# EAGLE board PCB (EAGLE 9.7.0)
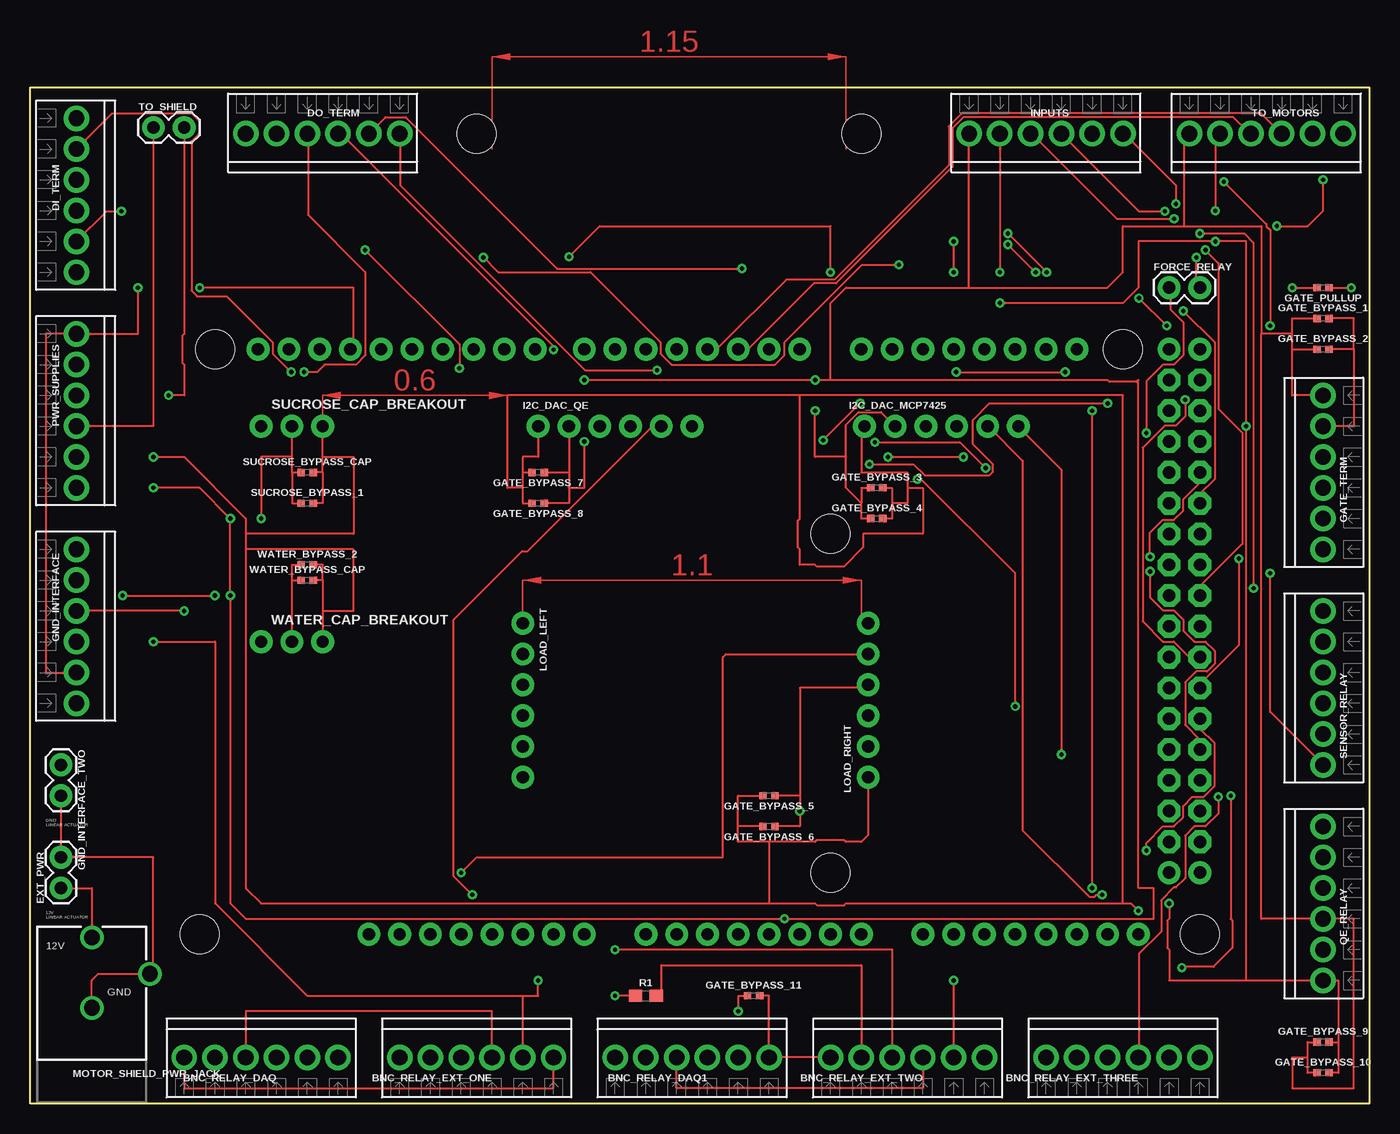
[diagram p0: board, top side]
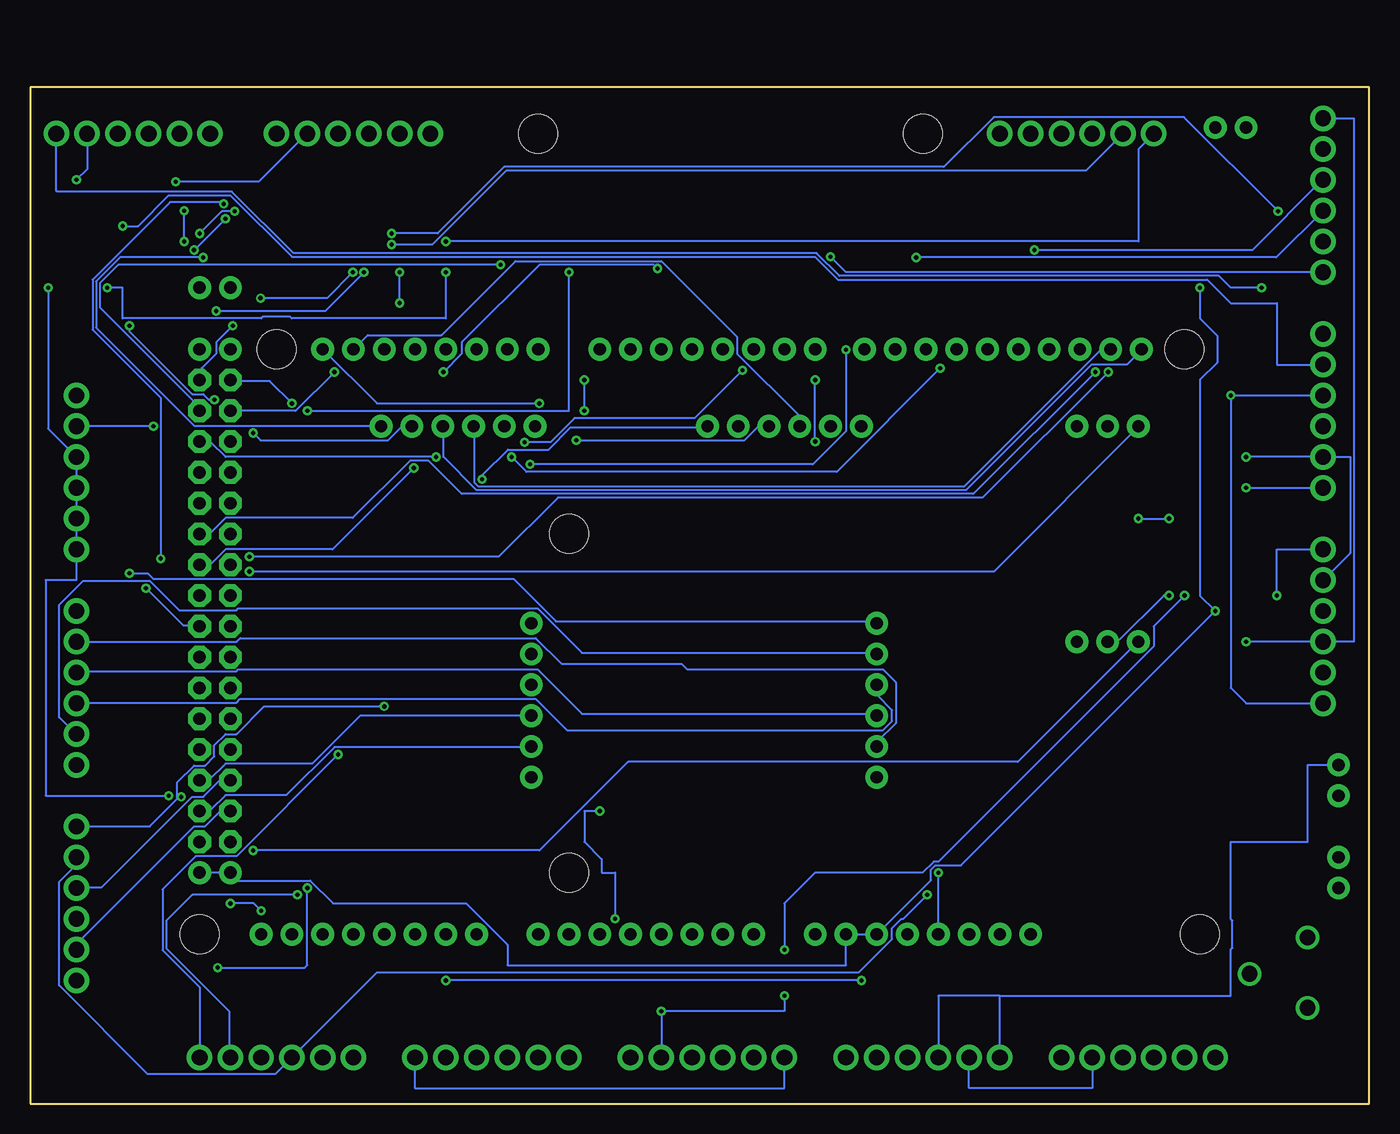
[diagram p1: board, bottom side, seen from below]

Size 110.49 x 83.82 mm. Coordinates in mm from the lower left corner, seen from the top.
Outline: 0,83.82 110.49,83.82 110.49,0 0,0 0,83.82
Copper layers (1*16): Top / Bottom
Stack-up Default Layer Stack: Top User Defined 0.035mm / Dielectric-1 User Defined 1.5mm / Bottom User Defined 0.035mm
Design rules "default": minimum track width 6mil, minimum drill 0.35mm, track to track 6mil, track to pad 6mil, pad to pad 6mil, via to via 6mil, smd to smd 6mil, copper to edge 40mil, drill to drill 6mil, minimum pad ring 10mil, minimum via ring 8mil, stop-mask expansion 4mil, vias tented up to drill 0mil, thermal gap 10mil
Holes 3.17 mm at 36.83,80.01 68.58,80.01

## Footprints (pad centres in the part's own frame; a part is rotated, then mirrored left to right if it is on the bottom)
1X06_2.54MM_SCREWPIN = drill 1.3 pad 2.1: 1 -6.35,0; 2 -3.81,0; 3 -1.27,0; 4 1.27,0; 5 3.81,0; 6 6.35,0
1X02 = drill 1.016 pad 1.88: 1 0,0; 2 2.54,0
0402-TIGHT = smd 0.6 x 0.6: 1 -0.5,0; 2 0.5,0
1X06_NO_SILK = drill 1.016 pad 1.88: 1 0,0; 2 2.54,0; 3 5.08,0; 4 7.62,0; 5 10.16,0; 6 12.7,0
POWER_JACK_PTH_BREAD = drill 1.3: GND 0,7.9; GNDBREAK 4.8,10.7; PWR 0,13.7
0603 = smd 1.1 x 1: 1 -0.85,0; 2 0.85,0
ARDUINO_DUE_F = drill 1.016 pad 1.88: 0 63.5,50.8; 1 60.96,50.8; 2 58.42,50.8; 3 55.88,50.8; 3.3V 35.56,2.54; 4 53.34,50.8; 5 50.8,50.8; 5V 38.1,2.54; 5V. 93.98,50.8; 5V.. 96.52,50.8; 6 48.26,50.8; 7 45.72,50.8; 8 41.656,50.8; 9 39.116,50.8; 10 36.576,50.8; 11 34.036,50.8; 12 31.496,50.8; 13 28.956,50.8; 14 68.58,50.8; 15 71.12,50.8; 16 73.66,50.8; 17 76.2,50.8; 18 78.74,50.8; 19 81.28,50.8; 20 83.82,50.8; 21 86.36,50.8; A0 50.8,2.54; A1 53.34,2.54; A2 55.88,2.54; A3 58.42,2.54; A4 60.96,2.54; A5 63.5,2.54; A6 66.04,2.54; A7 68.58,2.54; A8 73.66,2.54; A9 76.2,2.54; A10 78.74,2.54; A11 81.28,2.54; A12 83.82,2.54; A13 86.36,2.54; A14 88.9,2.54; A15 91.44,2.54; AREF 23.876,50.8; GND 26.416,50.8; GND. 43.18,2.54; GND.. 40.64,2.54; GND... 93.98,7.62; GND.... 96.52,7.62; I/OREF 30.48,2.54; N/C 27.94,2.54; RESET 33.02,2.54; SCL1 18.796,50.8; SDA1 21.336,50.8; VIN 45.72,2.54 | drill 1.016 pad 1.88 octagon: 22 93.98,48.26; 23 96.52,48.26; 24 93.98,45.72; 25 96.52,45.72; 26 93.98,43.18; 27 96.52,43.18; 28 93.98,40.64; 29 96.52,40.64; 30 93.98,38.1; 31 96.52,38.1; 32 93.98,35.56; 33 96.52,35.56; 34 93.98,33.02; 35 96.52,33.02; 36 93.98,30.48; 37 96.52,30.48; 38 93.98,27.94; 39 96.52,27.94; 40 93.98,25.4; 41 96.52,25.4; 42 93.98,22.86; 43 96.52,22.86; 44 93.98,20.32; 45 96.52,20.32; 46 93.98,17.78; 47 96.52,17.78; 48 93.98,15.24; 49 96.52,15.24; 50 93.98,12.7; 51 96.52,12.7; 52 93.98,10.16; 53 96.52,10.16 | hole 3.2: 15.24,50.8; 13.97,2.54; 66.04,35.56; 66.04,7.62; 90.17,50.8; 96.52,2.54
BRM-2508_VERTX = drill 1.016 pad 1.88: OUT -2.54,0; VDD 0,0; VSS 2.54,0

## Placement (x,y rotation side)
BNC_RELAY_DAQ  [1X06_2.54MM_SCREWPIN]  19.05,3.81 180 top
BNC_RELAY_DAQ1  [1X06_2.54MM_SCREWPIN]  54.61,3.81 180 top
BNC_RELAY_EXT_ONE  [1X06_2.54MM_SCREWPIN]  36.83,3.81 180 top
BNC_RELAY_EXT_THREE  [1X06_2.54MM_SCREWPIN]  90.17,3.81 180 top
BNC_RELAY_EXT_TWO  [1X06_2.54MM_SCREWPIN]  72.39,3.81 180 top
DI_TERM  0  [1X06_2.54MM_SCREWPIN]  3.81,74.93 90 top
DO_TERM  1  [1X06_2.54MM_SCREWPIN]  24.13,80.01 0 top
EXT_PWR  2  [1X02]  2.54,17.78 90 top
FORCE_RELAY  3  [1X02]  93.98,67.31 0 top
GATE_BYPASS_1  0.1uF  [0402-TIGHT]  106.68,64.77 0 top
GATE_BYPASS_2  10nF  [0402-TIGHT]  106.68,62.23 0 top
GATE_BYPASS_3  10nF  [0402-TIGHT]  69.85,50.8 0 top
GATE_BYPASS_4  0.1uF  [0402-TIGHT]  69.85,48.26 0 top
GATE_BYPASS_5  10nF  [0402-TIGHT]  60.96,25.4 180 top
GATE_BYPASS_6  0.1uF  [0402-TIGHT]  60.96,22.86 180 top
GATE_BYPASS_7  10nF  [0402-TIGHT]  41.91,52.07 180 top
GATE_BYPASS_8  0.1uF  [0402-TIGHT]  41.91,49.53 180 top
GATE_BYPASS_9  10nF  [0402-TIGHT]  106.68,5.08 0 top
GATE_BYPASS_10  0.1uF  [0402-TIGHT]  106.68,2.54 0 top
GATE_BYPASS_11  0.1uF  [0402-TIGHT]  59.69,8.89 0 top
GATE_PULLUP  3.3KOHM-0402T-1/16W-1%  [0402-TIGHT]  106.68,67.31 180 top
GATE_TERM  5  [1X06_2.54MM_SCREWPIN]  106.68,52.07 270 top
GND_INTERFACE  [1X06_2.54MM_SCREWPIN]  3.81,39.37 90 top
GND_INTERFACE_TWO  [1X02]  2.54,27.94 270 top
I2C_DAC_MCP7425  5  [1X06_NO_SILK]  68.83,55.88 0 top
I2C_DAC_QE  5  [1X06_NO_SILK]  41.91,55.88 0 top
INPUTS  6  [1X06_2.54MM_SCREWPIN]  83.82,80.01 0 top
LOAD_LEFT  7  [1X06_NO_SILK]  40.64,39.62 270 top
LOAD_RIGHT  8  [1X06_NO_SILK]  69.14,26.92 90 top
MOTOR_SHIELD_PWR_JACK  POWER_JACKPTH_BREAD  [POWER_JACK_PTH_BREAD]  5.08,0 0 top
PWR_SUPPLIES  [1X06_2.54MM_SCREWPIN]  3.81,57.15 90 top
QE_RELAY  5  [1X06_2.54MM_SCREWPIN]  106.68,16.51 270 top
R1  68.1k  [0603]  50.8,8.89 0 top
REWARDS_DUE  ARDUINO_DUE  [ARDUINO_DUE_F]  0,11.43 0 top
SENSOR_RELAY  9  [1X06_2.54MM_SCREWPIN]  106.68,34.29 270 top
SUCROSE_BYPASS_1  10nF  [0402-TIGHT]  22.86,49.53 0 top
SUCROSE_BYPASS_CAP  0.1uF  [0402-TIGHT]  22.86,52.07 0 top
SUCROSE_CAP_BREAKOUT  AT42QT1011-MAHR  [BRM-2508_VERTX]  21.59,55.88 0 top
TO_MOTORS  10  [1X06_2.54MM_SCREWPIN]  102,80.01 0 top
TO_SHIELD  0  [1X02]  10.16,80.52 0 top
WATER_BYPASS_2  10nF  [0402-TIGHT]  22.86,44.45 0 top
WATER_BYPASS_CAP  0.1uF  [0402-TIGHT]  22.86,43.18 0 top
WATER_CAP_BREAKOUT  AT42QT1011-MAHR  [BRM-2508_VERTX]  21.59,38.1 0 top

## Library data of the parts
BNC_RELAY_DAQ BNC_RELAY_DAQ1 BNC_RELAY_EXT_ONE BNC_RELAY_EXT_THREE BNC_RELAY_EXT_TWO DI_TERM DO_TERM GATE_TERM GND_INTERFACE INPUTS PWR_SUPPLIES QE_RELAY SENSOR_RELAY TO_MOTORS = SparkFun-Connectors; PROD_ID: CONN-14885
EXT_PWR FORCE_RELAY GND_INTERFACE_TWO TO_SHIELD = SparkFun-Connectors
GATE_BYPASS_1 GATE_BYPASS_4 GATE_BYPASS_6 GATE_BYPASS_8 GATE_BYPASS_10 GATE_BYPASS_11 SUCROSE_BYPASS_CAP WATER_BYPASS_CAP = SparkFun-RF; PROD_ID: CAP-15083
GATE_BYPASS_2 GATE_BYPASS_3 GATE_BYPASS_5 GATE_BYPASS_7 GATE_BYPASS_9 SUCROSE_BYPASS_1 WATER_BYPASS_2 = SparkFun-Capacitors; PROD_ID: CAP-16508
GATE_PULLUP = SparkFun-Resistors; PROD_ID: RES-15923
I2C_DAC_MCP7425 I2C_DAC_QE LOAD_LEFT LOAD_RIGHT = SparkFun-Connectors; PROD_ID: CONN-08437
MOTOR_SHIELD_PWR_JACK = SparkFun-Connectors; PROD_ID: COMP-13253
R1 = SparkFun-Resistors; PROD_ID: RES-09380
REWARDS_DUE = NO_SILK
SUCROSE_CAP_BREAKOUT WATER_CAP_BREAKOUT = 1011MOD

## Nets
3.3V: GND_INTERFACE.1 PWR_SUPPLIES.4 TO_SHIELD.2
5V: GATE_BYPASS_1.1 GATE_BYPASS_2.1 GATE_BYPASS_3.1 GATE_BYPASS_4.1 GATE_BYPASS_5.1 GATE_BYPASS_6.1 GATE_BYPASS_7.1 GATE_BYPASS_8.1 GATE_BYPASS_9.1 GATE_BYPASS_10.1 GATE_TERM.1 I2C_DAC_MCP7425.2 I2C_DAC_QE.2 INPUTS.1 LOAD_RIGHT.4 PWR_SUPPLIES.1 QE_RELAY.4 SUCROSE_BYPASS_1.1 SUCROSE_BYPASS_CAP.1 SUCROSE_CAP_BREAKOUT.VDD TO_MOTORS.1 WATER_BYPASS_2.1 WATER_BYPASS_CAP.1 WATER_CAP_BREAKOUT.VDD
5V_3A_GND: GND_INTERFACE.2 PWR_SUPPLIES.6 TO_MOTORS.6
5V_3A_PWR: PWR_SUPPLIES.5 TO_MOTORS.5
13.4V: PWR_SUPPLIES.3 TO_SHIELD.1
BLK: LOAD_LEFT.2 SENSOR_RELAY.5
BRUKER_GND: BNC_RELAY_EXT_TWO.4 GND_INTERFACE.6
CLK: LOAD_RIGHT.2 REWARDS_DUE.51
COM_REMOVE_SPOUT: REWARDS_DUE.3 TO_MOTORS.4
COM_SWAP_SPOUT: REWARDS_DUE.2 TO_MOTORS.3
DAQ_AGND: BNC_RELAY_EXT_ONE.4 BNC_RELAY_EXT_ONE.6 GND_INTERFACE_TWO.1
DAQ_GND: BNC_RELAY_EXT_ONE.2 BNC_RELAY_EXT_TWO.2 DI_TERM.6 GND_INTERFACE.3
DAT: LOAD_RIGHT.3 REWARDS_DUE.49
DGND: GND_INTERFACE.4 REWARDS_DUE.GND REWARDS_DUE.GND. REWARDS_DUE.GND.. REWARDS_DUE.GND... REWARDS_DUE.GND....
FLAGGER_ONE: BNC_RELAY_DAQ.6 BNC_RELAY_EXT_ONE.1
FLAGGER_TWO: BNC_RELAY_DAQ1.6 BNC_RELAY_EXT_TWO.1
FORCE_LOGIC: LOAD_RIGHT.5 REWARDS_DUE.3.3V
FORCE_OUT_REF: BNC_RELAY_EXT_THREE.2 FORCE_RELAY.1 I2C_DAC_MCP7425.5
FORCE_OUT_SIG: BNC_RELAY_EXT_THREE.1 FORCE_RELAY.2 I2C_DAC_MCP7425.6
GATE_DRIVE: DO_TERM.1 GATE_PULLUP.2
GATE_TRIGGER: DI_TERM.1 GATE_PULLUP.1 GATE_TERM.3 GATE_TERM.4 GATE_TERM.5 GATE_TERM.6
GND: GATE_BYPASS_1.2 GATE_BYPASS_2.2 GATE_BYPASS_3.2 GATE_BYPASS_4.2 GATE_BYPASS_5.2 GATE_BYPASS_6.2 GATE_BYPASS_7.2 GATE_BYPASS_8.2 GATE_BYPASS_9.2 GATE_BYPASS_10.2 GATE_TERM.2 GND_INTERFACE.5 I2C_DAC_MCP7425.1 I2C_DAC_QE.1 INPUTS.2 LOAD_RIGHT.1 PWR_SUPPLIES.2 QE_RELAY.6 SUCROSE_BYPASS_1.2 SUCROSE_BYPASS_CAP.2 SUCROSE_CAP_BREAKOUT.VSS TO_MOTORS.2 WATER_BYPASS_2.2 WATER_BYPASS_CAP.2 WATER_CAP_BREAKOUT.VSS
GRN: LOAD_LEFT.4 SENSOR_RELAY.3
IMAGING_SYNC: BNC_RELAY_DAQ1.4 BNC_RELAY_EXT_TWO.3
LINEAR_ACTUATOR_COMMAND: BNC_RELAY_DAQ.2 BNC_RELAY_EXT_ONE.5
MOTOR_PROPRIOCEPTION: BNC_RELAY_DAQ1.2 GATE_BYPASS_11.1 R1.1
MS_GND: EXT_PWR.2 GND_INTERFACE_TWO.2 MOTOR_SHIELD_PWR_JACK.GND MOTOR_SHIELD_PWR_JACK.GNDBREAK
MS_PWR: EXT_PWR.1 MOTOR_SHIELD_PWR_JACK.PWR
N$1: BNC_RELAY_EXT_TWO.5 R1.2
N$3: R1.1
N$4: BNC_RELAY_DAQ1.1 BNC_RELAY_EXT_TWO.6 GATE_BYPASS_11.2
PERMIT_SUCROSE: DO_TERM.2 REWARDS_DUE.31
PERMIT_WATER: DO_TERM.3 REWARDS_DUE.33
QE_1: QE_RELAY.3 REWARDS_DUE.48
QE_2: QE_RELAY.5 REWARDS_DUE.50
QE_OUT_REF: BNC_RELAY_EXT_THREE.4 I2C_DAC_QE.5 QE_RELAY.2
QE_OUT_SIG: BNC_RELAY_EXT_THREE.3 I2C_DAC_QE.6 QE_RELAY.1
RED: LOAD_LEFT.1 SENSOR_RELAY.6
REMOVE_SPOUTS: DO_TERM.5 REWARDS_DUE.24
SCL_FORCE: I2C_DAC_MCP7425.4 REWARDS_DUE.SCL1
SCL_QE: I2C_DAC_QE.4 REWARDS_DUE.21
SDA_FORCE: I2C_DAC_MCP7425.3 REWARDS_DUE.SDA1
SDA_QE: I2C_DAC_QE.3 REWARDS_DUE.20
SOLE_1_EN: INPUTS.3 REWARDS_DUE.37
SOLE_1_IN: INPUTS.5 REWARDS_DUE.41
SOLE_2_EN: INPUTS.4 REWARDS_DUE.39
SOLE_2_IN: INPUTS.6 REWARDS_DUE.43
SUCROSE_CAP_SIGNAL: REWARDS_DUE.47 SUCROSE_CAP_BREAKOUT.OUT
SUCROSE_LICK: DI_TERM.4 REWARDS_DUE.27
SUCROSE_REWARD: DI_TERM.2 REWARDS_DUE.23
SWAP_SPOUTS: DO_TERM.4 REWARDS_DUE.22
UCS_COMMAND: BNC_RELAY_DAQ.4 BNC_RELAY_EXT_ONE.3
WATER_CAP_SIGNAL: REWARDS_DUE.45 WATER_CAP_BREAKOUT.OUT
WATER_LICK: DI_TERM.5 REWARDS_DUE.29
WATER_REWARD: DI_TERM.3 REWARDS_DUE.25
WET_START: DO_TERM.6 REWARDS_DUE.35
WHT: LOAD_LEFT.3 SENSOR_RELAY.4
YLW: LOAD_LEFT.5 SENSOR_RELAY.2

## Tracks (layer width: path | path; a pad name or v marks a point on that pad's centre or on a via)
3.3V  (via drill 0.35)
  Top 0.152: TO_SHIELD.2 12.7,63.5 12.55,63.35 12.55,61.12 12.7,60.96 12.7,58.42 v11.43,58.42
  Bottom 0.152: PWR_SUPPLIES.4 v11.43,58.42 11.43,34.29 10.16,33.02 GND_INTERFACE.1
5V  (via drill 0.35)
  Top 0.152: WATER_CAP_BREAKOUT.VDD 21.59,43.18 | 21.59,43.18 WATER_BYPASS_CAP.1 | 21.59,43.18 21.59,44.45 WATER_BYPASS_2.1 | 21.59,52.07 21.59,53.34 | 21.59,53.34 SUCROSE_CAP_BREAKOUT.VDD | 21.59,52.07 SUCROSE_BYPASS_CAP.1 | 21.59,52.07 21.59,49.53 SUCROSE_BYPASS_1.1 | I2C_DAC_QE.2 44.45,52.07 | GATE_BYPASS_7.1 44.45,52.07 | 44.45,52.07 44.45,50.8 | 44.45,50.8 44.45,49.53 GATE_BYPASS_8.1 | LOAD_RIGHT.4 68.89,34.29 63.5,34.29 63.5,25.4 | 63.5,25.4 GATE_BYPASS_5.1 | 63.5,25.4 v63.5,24.13 63.5,22.86 GATE_BYPASS_6.1 | GATE_BYPASS_10.1 105.41,2.54 105.41,3.81 | 105.41,3.81 105.41,5.08 GATE_BYPASS_9.1 | 105.41,3.81 104.14,3.81 104.14,1.27 109.22,1.27 109.22,15.24 QE_RELAY.4 101.6,15.24 101.6,63.5 | GATE_TERM.1 104.14,58.42 104.14,62.23 | 104.14,62.23 GATE_BYPASS_2.1 | 104.14,62.23 104.14,63.5 | 104.14,63.5 104.14,64.77 GATE_BYPASS_1.1 | GATE_BYPASS_4.1 68.58,48.26 68.58,49.53 | 68.58,49.53 68.58,50.8 GATE_BYPASS_3.1 | 21.59,53.34 19.05,53.34 v19.05,48.26 | v10.16,50.8 13.97,50.8 v16.51,48.26 v16.51,41.91 16.51,16.51 17.78,15.24 v62.23,15.24 92.71,15.24 92.71,17.78 91.44,17.78 91.44,59.69 91.28,59.54 89.05,59.54 88.9,59.69 66.04,59.69 | 66.04,59.69 v64.77,59.69 v45.72,59.69 | 68.58,49.53 67.31,50.8 67.31,53.34 | 67.31,53.34 67.31,56.01 68.35,57.05 70.21,57.05 I2C_DAC_MCP7425.2 | 67.31,53.34 64.77,53.34 v64.77,57.15 | 44.45,50.8 45.72,50.8 v45.72,54.61 | 66.04,59.69 66.04,66.04 67.31,67.31 77.47,67.31 | 77.47,67.31 88.9,67.31 90.17,68.58 90.17,72.39 95.25,72.39 | 95.25,72.39 101.6,72.39 101.6,63.5 | 95.25,72.39 95.25,79.61 TO_MOTORS.1 | 104.14,63.5 101.6,63.5 | 77.47,67.31 INPUTS.1
  Bottom 0.152: v10.16,50.8 PWR_SUPPLIES.1 | v19.05,48.26 v16.51,48.26 | v63.5,24.13 64.77,24.13 64.77,21.59 63.35,20.16 63.35,19.05 62.23,19.05 v62.23,15.24 | v64.77,57.15 v64.77,59.69 | v45.72,54.61 v45.72,59.69 | WATER_CAP_BREAKOUT.VDD 20.78,38.1 16.97,41.91 v16.51,41.91
5V_3A_GND  (via drill 0.35)
  Top 0.152: GND_INTERFACE.2 1.27,35.56 1.27,63.5 PWR_SUPPLIES.6 8.89,63.5 v8.89,67.31
  Bottom 0.152: TO_MOTORS.6 108.35,75.33 108.25,75.24 93.85,75.24 88.77,70.16 45.61,70.16 43.73,68.28 12.39,68.28 11.43,67.31 v8.89,67.31
5V_3A_PWR  (via drill 0.35)
  Top 0.152: v106.68,76.2 106.68,73.66 105.41,72.39 v102.87,72.39
  Bottom 0.152: TO_MOTORS.5 105.81,77.07 v106.68,76.2 | v102.87,72.39 101.6,72.39 99.06,74.93 93.98,74.93 88.9,69.85 45.74,69.85 43.86,67.97 13.36,67.97 11.43,66.04 7.62,66.04 7.62,60.96 PWR_SUPPLIES.5
13.4V
  Top 0.152: TO_SHIELD.1 10.16,55.88 PWR_SUPPLIES.3
BLK
  Bottom 0.152: LOAD_LEFT.2 40.74,37.19 64.97,37.19 68.63,40.84 93.32,40.84 93.47,40.69 98.2,40.69 100.63,43.13 106.12,43.13 108.1,41.15 108.1,31.85 106.73,30.48 SENSOR_RELAY.5
BRUKER_GND  (via drill 0.35)
  Top 0.152: v7.62,41.91 v15.24,41.91 | v48.26,12.7 71.12,12.7 BNC_RELAY_EXT_TWO.4
  Bottom 0.152: GND_INTERFACE.6 7.62,45.72 v7.62,41.91 | v15.24,41.91 17.78,39.37 17.78,37.72 35.54,19.96 35.94,19.96 36.85,19.05 45.72,19.05 48.26,16.51 v48.26,12.7
CLK
  Bottom 0.152: REWARDS_DUE.51 96.52,24.23 95.61,24.23 94.39,25.45 89.36,25.45 85.39,29.41 69.24,29.41 LOAD_RIGHT.2
COM_REMOVE_SPOUT
  Top 0.152: REWARDS_DUE.3 55.98,62.33 56.74,62.33 62.38,67.97 66.34,67.97 75.79,77.42 75.79,80.62 76.86,81.69 101.55,81.69 103.23,80.01 TO_MOTORS.4
COM_SWAP_SPOUT
  Top 0.152: REWARDS_DUE.2 58.42,62.33 59.33,62.33 64.67,67.67 66.5,67.67 76.1,77.27 76.1,80.47 77.01,81.38 99.26,81.38 100.63,80.01 TO_MOTORS.3
DAQ_AGND
  Bottom 0.152: BNC_RELAY_EXT_ONE.6 30.48,8.89 | 30.48,8.89 35.56,8.89 BNC_RELAY_EXT_ONE.4 | 30.48,8.89 11.43,8.89 11.43,12.7 11.28,12.86 11.28,15.09 11.43,15.24 11.43,21.59 5.08,21.59 5.08,27.94 GND_INTERFACE_TWO.1
DAQ_GND  (via drill 0.35)
  Top 0.152: v10.16,38.1 15.24,38.1 15.24,16.51 22.86,8.89 40.64,8.89 | 40.64,8.89 BNC_RELAY_EXT_ONE.2 | BNC_RELAY_EXT_TWO.2 v76.2,10.16 | 40.64,8.89 41.91,8.89 v41.91,10.16
  Bottom 0.152: v10.16,38.1 GND_INTERFACE.3 1.27,38.1 1.27,81.28 DI_TERM.6 | v41.91,10.16 v76.2,10.16
DAT
  Bottom 0.152: REWARDS_DUE.49 95.76,26.67 94.39,28.04 87.22,28.04 83.26,32 69.24,32 LOAD_RIGHT.3
DGND  (via drill 0.35)
  Top 0.152: v12.7,40.64 GND_INTERFACE.4 | REWARDS_DUE.GND 26.67,62.48 26.67,67.31 v13.97,67.31
  Bottom 0.152: v13.97,67.31 13.97,64.77 12.55,63.35 12.55,61.12 13.97,59.69 13.97,41.91 v12.7,40.64 33.68,19.66 35.81,19.66 36.17,19.3 36.17,18.44 REWARDS_DUE.GND.. REWARDS_DUE.GND. 43.18,11.43 71.12,11.43 71.12,13.08 74.55,16.51 85.5,16.51 87.38,18.39 93.32,18.39 REWARDS_DUE.GND... REWARDS_DUE.GND....
FLAGGER_ONE
  Top 0.152: BNC_RELAY_EXT_ONE.1 43.18,1.27 12.7,1.27 BNC_RELAY_DAQ.6
FLAGGER_TWO
  Bottom 0.152: BNC_RELAY_DAQ1.6 48.26,1.27 78.74,1.27 BNC_RELAY_EXT_TWO.1
FORCE_LOGIC  (via drill 0.35)
  Top 0.152: v35.56,19.05 36.83,20.32 57.15,20.32 57.15,36.83 57.4,37.08 LOAD_RIGHT.5
  Bottom 0.152: REWARDS_DUE.3.3V v35.56,19.05
FORCE_OUT_REF  (via drill 0.35)
  Top 0.152: v92.1,55.32 92.1,59.59 93.47,60.96 94.39,60.96 95.15,61.72 95.15,64.47 94.08,65.53 94.08,67.21 FORCE_RELAY.1 | v88.44,17.22 87.99,17.22 87.83,17.07 87.38,17.07 81.89,22.55 81.89,53.04 79.15,55.78 I2C_DAC_MCP7425.5
  Bottom 0.152: v92.1,55.32 91.49,54.71 80.97,54.71 79.91,55.78 79.15,55.78 I2C_DAC_MCP7425.5 | v88.44,17.22 97.13,17.22 99.26,15.09 99.26,12.8 94.08,7.62 94.08,3.81 BNC_RELAY_EXT_THREE.2
FORCE_OUT_SIG  (via drill 0.35)
  Top 0.152: v96.22,69.8 96.22,67.67 96.52,67.36 FORCE_RELAY.2 | v85.09,28.8 85.09,52.27 81.58,55.78 I2C_DAC_MCP7425.6
  Bottom 0.152: v96.22,69.8 103.07,69.8 105.05,67.82 105.05,64.01 96.98,55.93 81.58,55.93 I2C_DAC_MCP7425.6 | BNC_RELAY_EXT_THREE.1 96.52,9.6 99.57,12.65 99.57,17.68 96.83,20.42 93.47,20.42 v85.09,28.8
GATE_DRIVE  (via drill 0.35)
  Top 0.152: v76.2,68.58 v76.2,71.12 | v104.14,67.31 GATE_PULLUP.2
  Bottom 0.152: DO_TERM.1 19.05,78.74 19.05,71.12 v76.2,71.12 | v76.2,68.58 76.2,64.77 88.9,64.77 89.05,64.92 91.28,64.92 91.44,64.77 102.87,64.77 102.87,67.31 v104.14,67.31
GATE_TRIGGER  (via drill 0.35)
  Top 0.152: GATE_PULLUP.1 v109.02,67.31 | v44.45,69.85 46.99,72.39 66.04,72.39 v66.04,68.58 | v99.06,25.4 99.06,15.24 99.21,15.09 99.21,12.86 97.63,11.28 95.1,11.28 v95.04,11.22 | v87.63,17.78 v87.63,57.15
  Bottom 0.152: v109.02,67.31 109.02,55.68 GATE_TERM.3 GATE_TERM.4 | GATE_TERM.4 106.68,50.75 | 106.68,50.75 106.68,48.31 | 106.68,48.31 GATE_TERM.5 | GATE_TERM.5 GATE_TERM.6 106.68,43.18 109.22,43.18 109.22,25.4 v99.06,25.4 | DI_TERM.1 43.18,68.58 v44.45,69.85 | v95.04,11.22 87.84,11.22 87.63,11.43 v87.63,17.78 | v87.63,57.15 66.04,57.15 v66.04,68.58 | GATE_TERM.5 106.73,48.31 106.68,48.31 | 106.68,50.75 106.73,50.75 GATE_TERM.4
GND  (via drill 0.35)
  Top 0.152: WATER_BYPASS_2.2 24.13,44.45 24.13,43.18 | 24.13,43.18 WATER_BYPASS_CAP.2 | 24.13,43.18 24.13,40.64 | 24.13,40.64 WATER_CAP_BREAKOUT.VSS | 24.13,52.07 24.13,53.34 | 24.13,53.34 SUCROSE_CAP_BREAKOUT.VSS | 24.13,52.07 SUCROSE_BYPASS_CAP.2 | 24.13,52.07 24.13,49.53 SUCROSE_BYPASS_1.2 | I2C_DAC_QE.1 41.91,53.34 40.64,53.34 40.64,52.07 | 40.64,52.07 GATE_BYPASS_7.2 | 40.64,52.07 40.64,50.8 | 40.64,50.8 40.64,49.53 GATE_BYPASS_8.2 | LOAD_RIGHT.1 69.14,22.15 68.58,21.59 67.31,21.59 67.16,21.74 64.92,21.74 64.77,21.59 60.96,21.59 | 60.96,21.59 58.42,21.59 58.42,22.86 | GATE_BYPASS_6.2 58.42,22.86 | 58.42,22.86 58.42,25.4 GATE_BYPASS_5.2 | GATE_BYPASS_9.2 107.95,5.08 | 107.95,5.08 107.95,2.54 GATE_BYPASS_10.2 | 107.95,5.08 107.95,10.16 QE_RELAY.6 100.33,10.16 | GATE_TERM.2 109.22,55.88 109.22,62.23 | 109.22,62.23 GATE_BYPASS_2.2 | 109.22,62.23 109.22,64.77 GATE_BYPASS_1.2 | GATE_BYPASS_3.2 71.12,50.8 71.12,49.53 | 71.12,49.53 71.12,48.26 GATE_BYPASS_4.2 | I2C_DAC_MCP7425.1 68.58,55.63 68.58,52.07 72.39,52.07 72.39,50.8 | 72.39,50.8 72.39,49.53 71.12,49.53 | 24.13,53.34 26.67,53.34 26.67,46.99 17.78,46.99 | v10.16,53.34 12.7,53.34 17.78,48.26 17.78,46.99 | 17.78,46.99 17.78,45.72 | 17.78,45.72 17.78,17.78 19.05,16.51 60.96,16.51 | 60.96,16.51 64.77,16.51 64.92,16.36 67.16,16.36 67.31,16.51 90.17,16.51 | 24.13,40.64 26.67,40.64 26.67,45.72 17.78,45.72 | 60.96,21.59 60.96,16.51 | 90.17,16.51 90.17,58.42 63.5,58.42 | 63.5,58.42 39.37,58.42 39.37,50.8 40.64,50.8 | 72.39,50.8 73.66,50.8 73.66,46.99 68.73,46.99 68.73,45.88 67.16,44.3 64.92,44.3 64.77,44.45 63.5,44.45 63.5,45.72 63.35,45.88 63.35,48.1 63.5,48.26 63.5,58.42
  Top 0.152: v93.98,16.51 93.98,15.24 93.83,15.09 93.83,12.86 93.98,12.7 93.98,10.16 100.33,10.16 | 100.33,10.16 v100.33,55.88 100.33,71.12 v97.79,71.12 91.44,71.12 91.44,67.31 90.17,66.04 v80.01,66.04 | v80.01,68.58 80.01,78.74 80.06,78.79 80.06,80.01 INPUTS.2 | TO_MOTORS.2 97.79,79.61 v97.79,73.66 | 90.17,16.51 90.83,16.51 v91.44,15.9
  Bottom 0.152: v10.16,53.34 PWR_SUPPLIES.2 1.57,53.34 1.57,45.41 GND_INTERFACE.5 | v80.01,66.04 v80.01,68.58 | v97.79,71.12 v97.79,73.66 | v100.33,55.88 GATE_TERM.2 | v93.98,16.51 92.05,16.51 v91.44,15.9
GRN
  Bottom 0.152: LOAD_LEFT.4 40.74,32.16 64.97,32.16 68.63,35.81 93.32,35.81 93.47,35.66 106.58,35.66 SENSOR_RELAY.3
IMAGING_SYNC
  Top 0.152: BNC_RELAY_EXT_TWO.3 73.66,1.27 53.34,1.27 BNC_RELAY_DAQ1.4
LINEAR_ACTUATOR_COMMAND
  Bottom 0.152: BNC_RELAY_EXT_ONE.5 33.02,1.27 22.86,1.27 BNC_RELAY_DAQ.2
MOTOR_PROPRIOCEPTION  (via drill 0.35)
  Top 0.152: R1.1 v48.26,8.89 | v58.42,7.62 58.42,8.89 GATE_BYPASS_11.1
  Bottom 0.152: BNC_RELAY_DAQ1.2 v58.42,7.62 48.26,7.62 v48.26,8.89
MS_GND
  Top 0.152: MOTOR_SHIELD_PWR_JACK.GND 5.08,10.16 5.62,10.7 MOTOR_SHIELD_PWR_JACK.GNDBREAK 10.16,10.98 10.16,20.32 EXT_PWR.2 GND_INTERFACE_TWO.2
MS_PWR
  Top 0.152: MOTOR_SHIELD_PWR_JACK.PWR 5.08,17.78 EXT_PWR.1
N$1
  Top 0.152: R1.2 52.07,9.31 52.07,11.43 68.58,11.43 BNC_RELAY_EXT_TWO.5
N$4
  Top 0.152: GATE_BYPASS_11.2 60.96,8.89 BNC_RELAY_DAQ1.1 BNC_RELAY_EXT_TWO.6
PERMIT_SUCROSE  (via drill 0.35)
  Top 0.152: REWARDS_DUE.31 96.52,50.29 97.74,51.51 97.74,62.79 v95.15,65.38 | v80.67,70.87 v82.96,68.58
  Bottom 0.152: v95.15,65.38 86.16,65.38 v82.96,68.58 | v80.67,70.87 77.32,70.87 71.22,76.96 23.37,76.96 DO_TERM.2
PERMIT_WATER  (via drill 0.35)
  Top 0.152: v22.61,60.35 23.67,60.35 24.28,60.96 26.87,60.96 27.64,61.72 27.64,68.58 22.91,73.3 22.91,80.01 DO_TERM.3
  Bottom 0.152: v22.61,60.35 32.66,50.29 74.88,50.29 77.62,53.04 79.15,53.04 83.87,48.31 94.39,48.31 95.61,47.09 96.52,47.09 REWARDS_DUE.33
QE_1
  Bottom 0.152: REWARDS_DUE.48 94.84,26.67 96.22,25.3 97.13,25.3 104.6,17.83 106.58,17.83 QE_RELAY.3
QE_2
  Bottom 0.152: REWARDS_DUE.50 94.08,24.08 94.84,24.08 96.06,22.86 96.98,22.86 106.58,13.26 106.58,12.8 QE_RELAY.5
QE_OUT_REF  (via drill 0.35)
  Top 0.152: v36.47,17.22 34.95,18.75 34.95,39.93 40.59,45.57 41.05,45.57 51.26,55.78 52.02,55.78 I2C_DAC_QE.5
  Bottom 0.152: v36.47,17.22 38.46,15.24 38.61,15.24 39.37,14.48 39.37,13.56 42.11,10.82 81.89,10.82 BNC_RELAY_EXT_THREE.4 90.27,2.44 100.79,2.44 108.1,9.75 108.1,18.29 106.73,19.66 106.73,20.27 QE_RELAY.2
QE_OUT_SIG  (via drill 0.35)
  Top 0.152: v73.2,51.51 73.51,51.51 81.28,43.74 v81.28,32.77 | v98.04,25.3 98.04,23.93 96.98,22.86 96.06,22.86 95.3,22.1 95.3,18.59 94.54,17.83 94.39,17.83 93.32,16.76 93.32,14.17 91.49,12.34 91.49,3.81 BNC_RELAY_EXT_THREE.3
  Bottom 0.152: v73.2,51.51 73.2,51.82 71.07,53.95 67.72,53.95 65.89,55.78 54.61,55.78 I2C_DAC_QE.6 | v81.28,32.77 91.19,32.77 93.47,30.48 94.39,30.48 95.3,29.57 95.3,28.65 96.06,27.89 96.98,27.89 98.35,26.52 98.35,25.3 | 98.35,25.3 98.35,25.15 100.63,22.86 QE_RELAY.1 | 98.35,25.3 v98.04,25.3
RED  (via drill 0.35)
  Top 0.152: v102.31,43.74 102.31,32.31 SENSOR_RELAY.6
  Bottom 0.152: v102.31,43.74 100.79,43.74 100.33,43.28 70.61,43.28 67.11,39.78 40.74,39.78 LOAD_LEFT.1
REMOVE_SPOUTS  (via drill 0.35)
  Top 0.152: v76.4,60.35 v85.39,60.35 | v58.72,68.88 43.48,68.88 30.99,81.38 29.31,81.38 DO_TERM.5
  Bottom 0.152: REWARDS_DUE.24 88.59,57.15 v85.39,60.35 | v76.4,60.35 74.88,61.87 74.88,62.79 68.48,69.19 59.03,69.19 v58.72,68.88
SCL_FORCE
  Bottom 0.152: I2C_DAC_MCP7425.4 76.4,55.78 76.4,53.34 73.66,50.6 33.27,50.6 22.91,60.96 20.01,60.96 18.8,62.18 REWARDS_DUE.SCL1
SCL_QE  (via drill 0.35)
  Top 0.152: v68.48,57.76 v65.43,54.71
  Bottom 0.152: v65.43,54.71 51.56,54.71 50.49,55.78 49.58,55.78 I2C_DAC_QE.4 | v68.48,57.76 81.89,57.76 REWARDS_DUE.21
SDA_FORCE
  Bottom 0.152: I2C_DAC_MCP7425.3 73.81,55.78 73.81,51.21 73.51,50.9 33.43,50.9 22.15,62.18 21.39,62.18 REWARDS_DUE.SDA1
SDA_QE
  Bottom 0.152: I2C_DAC_QE.3 46.99,56.69 52.17,61.87 52.17,63.25 58.42,69.49 70.46,69.49 76.56,63.4 82.65,63.4 REWARDS_DUE.20
SOLE_1_EN  (via drill 0.35)
  Top 0.152: REWARDS_DUE.37 96.52,42.67 100.02,46.18 100.02,55.32 98.04,57.3 98.04,69.34 v96.98,70.41 | v94.39,73 89.66,73 82.65,80.01 INPUTS.3
  Bottom 0.152: v94.39,73 v96.98,70.41
SOLE_1_IN  (via drill 0.35)
  Top 0.152: v95.3,58.06 95.3,56.69 94.54,55.93 93.62,55.93 91.8,54.1 91.8,39.78 93.47,38.1 94.39,38.1 95.61,36.88 96.52,36.88 REWARDS_DUE.41 | v102.31,64.16 102.31,72.09 102.01,72.39 102.01,72.54 v98.5,76.05
  Bottom 0.152: v95.3,58.06 95.76,58.06 96.22,58.52 97.13,58.52 102.31,63.7 v102.31,64.16 | v98.5,76.05 91.64,76.05 87.68,80.01 INPUTS.5
SOLE_2_EN  (via drill 0.35)
  Top 0.152: v100.94,42.52 100.94,71.02 100.18,71.78 v96.52,71.78 | v93.62,73.61 91.49,73.61 INPUTS.4
  Bottom 0.152: v100.94,42.52 97.89,39.47 96.52,39.47 REWARDS_DUE.39 | v96.52,71.78 94.69,73.61 v93.62,73.61
SOLE_2_IN  (via drill 0.35)
  Top 0.152: REWARDS_DUE.43 96.52,34.59 99.72,37.8 v99.72,44.96 | v94.54,74.22 94.54,75.74 90.27,80.01 INPUTS.6
  Bottom 0.152: v99.72,44.96 99.72,58.22 105.36,63.86 105.36,67.97 98.96,74.37 94.69,74.37 v94.54,74.22
SUCROSE_CAP_SIGNAL  (via drill 0.35)
  Top 0.152: REWARDS_DUE.47 96.52,30.02 95.3,31.24 95.3,34.75 96.22,35.66 97.13,35.66 97.74,36.27 97.74,37.34 96.98,38.1 96.06,38.1 95.15,39.01 95.15,39.93 94.39,40.69 93.47,40.69 92.41,41.76 v92.41,43.89
  Bottom 0.152: v92.41,43.89 30.99,43.89 19.1,55.78 SUCROSE_CAP_BREAKOUT.OUT
SUCROSE_LICK  (via drill 0.35)
  Top 0.152: v70.76,53.34 v77.01,53.34 | v35.41,60.65 35.41,62.64 v27.64,70.41
  Bottom 0.152: v77.01,53.34 94.39,53.34 95.61,54.56 96.52,54.56 REWARDS_DUE.27 | v70.76,53.34 69.55,52.12 43.94,52.12 v35.41,60.65 | v27.64,70.41 9.65,70.41 3.86,76.2 DI_TERM.4
SUCROSE_REWARD  (via drill 0.35)
  Top 0.152: v91.49,66.45 v93.78,64.16 | v80.67,71.78 v83.87,68.58 | v7.52,73.61 6.3,73.61 DI_TERM.2
  Bottom 0.152: REWARDS_DUE.23 96.52,60.5 95.15,61.87 95.15,62.79 v93.78,64.16 | v91.49,66.45 86,66.45 v83.87,68.58 | v80.67,71.78 76.86,71.78 71.37,77.27 35.1,77.27 30.99,81.38 15.29,81.38 v7.52,73.61
SWAP_SPOUTS  (via drill 0.35)
  Top 0.152: v88.9,57.76 79.15,57.76 77.77,56.39 77.77,54.41 79.45,52.73 79.45,52.12 79.15,51.82 73.81,51.82 72.9,52.73 v69.24,52.73 | v43.18,62.18 43.18,62.48 25.65,80.01 DO_TERM.4
  Bottom 0.152: v88.9,57.76 90.73,59.59 93.93,59.59 REWARDS_DUE.22 | v69.24,52.73 45.92,52.73 43.18,55.47 v43.18,62.18
UCS_COMMAND
  Top 0.152: BNC_RELAY_EXT_ONE.3 38.1,7.62 17.78,7.62 BNC_RELAY_DAQ.4
WATER_CAP_SIGNAL  (via drill 0.35)
  Top 0.152: REWARDS_DUE.45 96.52,30.94 97.74,29.72 97.74,26.21 96.83,25.3 95.91,25.3 95.15,24.54 95.15,23.62 94.39,22.86 93.47,22.86 92.1,21.49 v92.1,20.88
  Bottom 0.152: v92.1,20.88 68.48,20.88 61.16,28.19 29.01,28.19 19.1,38.1 WATER_CAP_BREAKOUT.OUT
WATER_LICK  (via drill 0.35)
  Top 0.152: REWARDS_DUE.29 96.52,51.21 95.15,49.84 95.15,48.92 94.39,48.16 93.47,48.16 92.41,47.09 v92.41,45.11 | v21.54,60.35 20.01,61.87 20.01,62.79 16.21,66.6 13.77,66.6 13.31,67.06 13.31,79.4 13.92,80.01 13.92,81.08 13.31,81.69 6.76,81.69 DI_TERM.5
  Bottom 0.152: v92.41,45.11 71.83,45.11 66.95,49.99 31.9,49.99 v21.54,60.35
WATER_REWARD  (via drill 0.35)
  Top 0.152: v71.68,69.19 68.63,69.19 62.23,62.79 62.23,61.72 61.47,60.96 52.93,60.96 52.02,61.87 52.02,62.79 46.23,68.58 38.61,68.58 v37.39,69.8
  Bottom 0.152: REWARDS_DUE.25 96.52,57.46 104.75,65.68 104.75,67.67 103.23,69.19 v71.68,69.19 | v37.39,69.8 7.67,69.8 DI_TERM.3
WET_START  (via drill 0.35)
  Top 0.152: v78.84,52.43 76.71,54.56 v69.7,54.56 | v51.71,60.5 45.77,60.5 30.53,75.74 30.53,80.01 DO_TERM.6
  Bottom 0.152: v78.84,52.43 85.55,45.72 94.39,45.72 95.61,44.5 96.52,44.5 REWARDS_DUE.35 | v69.7,54.56 67.56,54.56 65.58,56.54 55.68,56.54 v51.71,60.5
WHT
  Bottom 0.152: LOAD_LEFT.3 40.59,34.44 40.59,33.68 39.37,32.46 39.37,31.55 40.13,30.79 66.19,30.79 68.78,33.38 93.17,33.38 93.47,33.07 106.58,33.07 SENSOR_RELAY.4
YLW
  Bottom 0.152: SENSOR_RELAY.2 93.47,38.1 93.17,38.41 68.78,38.41 66.65,36.27 56.74,36.27 56.29,35.81 40.13,35.81 39.06,34.75 39.06,31.39 40.59,29.87 40.59,29.57 LOAD_LEFT.5
(copper drawn outside any net)
  shapes: Top area x3

## Text on the board
tPlace: GND / LINEAR ACTUATOR | 12V / LINEAR ACTUATOR | 12V | GND